# EAGLE board KAI_bit1 (EAGLE 9.4.2)
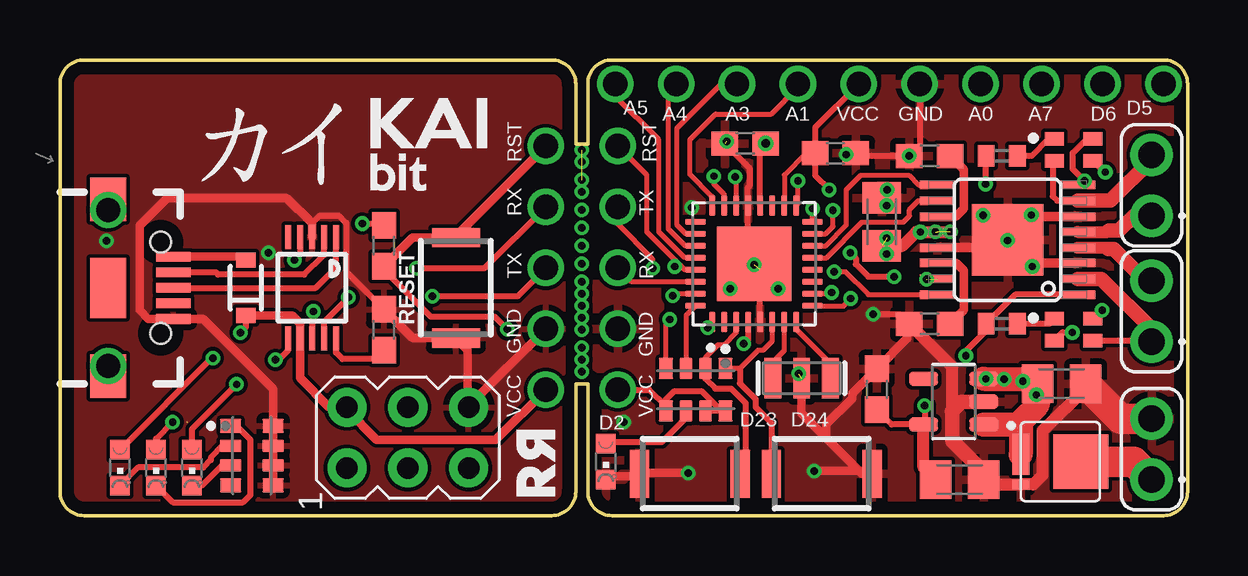
[diagram p0: board, top side]
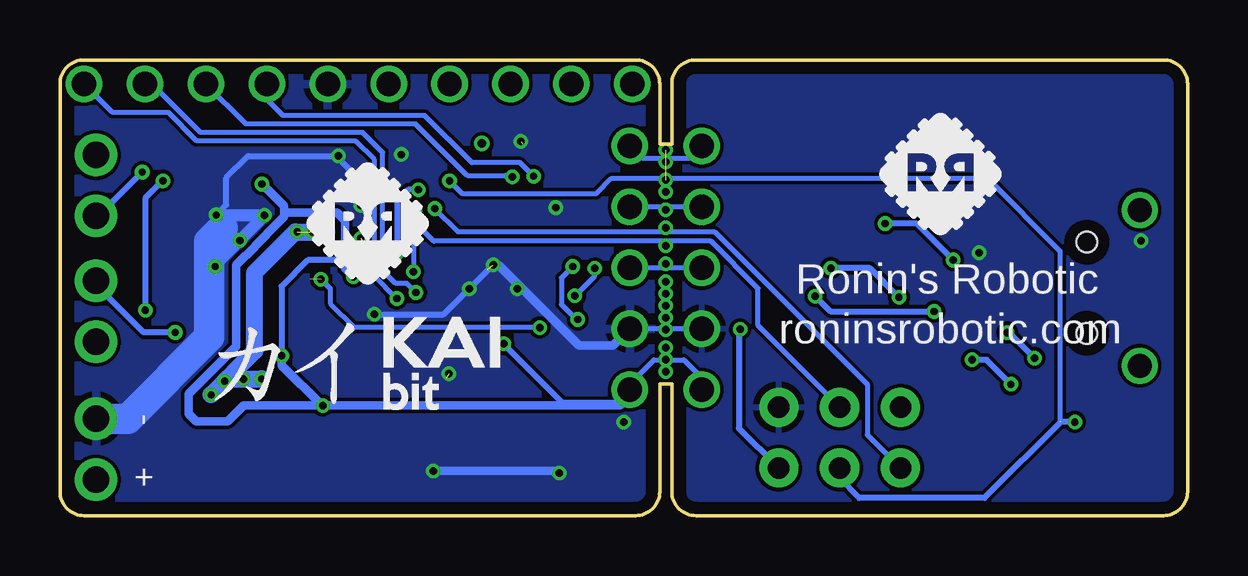
[diagram p1: board, bottom side, seen from below]

Size 47 x 19 mm. Coordinates in mm from the lower left corner, seen from the top.
Outline: 23,19 46,19 arc-90 47,18 47,1 arc-90 46,0 23,0 arc-90 22,1 22,5.5 21.5,5.5 21.5,1 arc-90 20.5,0 1,0 arc-90 0,1 0,18 arc-90 1,19 20.5,19 arc-90 21.5,18 21.5,15.5 22,15.5 22,18 arc-90 23,19
Copper layers (1*16): Top 0.035mm / dielectric 1.6mm / Bottom 0.035mm
Design rules "Elecrow_2-layer_PCB_eagle_rule": minimum track width 6mil, minimum drill 12mil, track to track 6mil, track to pad 6mil, pad to pad 6mil, via to via 8mil, smd to smd 0mil, copper to edge 20mil, drill to drill 10mil, minimum pad ring 6mil, minimum via ring 6mil, stop-mask expansion 0mil, vias tented up to drill 100mil, thermal gap 10mil

## Footprints (pad centres in the part's own frame; a part is rotated, then mirrored left to right if it is on the bottom)
C0805K = smd 1.3 x 1.6: 1 -1,0; 2 1,0
SOD-323 = smd 0.63 x 0.83: 1 -1.15,0; 2 1.15,0
AVRISP = drill 0.9 pad 1.626: 1 -1.27,2.54; 2 1.27,2.54; 3 -1.27,0; 4 1.27,0; 5 -1.27,-2.54; 6 1.27,-2.54
USB-B-MICRO-SMD = smd 1.45 x 0.4: D+ 2.725,0; D- 2.725,0.65; GND 2.725,-1.3; ID 2.725,-0.65; VBUS 2.725,1.3 | smd 1.5 x 1.8: SHIELD1 0,3.685; SHIELD2 0,-3.685 | smd 1.5 x 2.5: SHIELD3 0,0 | hole 0.85: 2.2,1.9; 2.2,-1.9
1X10DFR = drill 1.016 pad 1.524: P$1 0,0; P$2 2.54,0; P$3 5.08,0; P$4 7.62,0; P$5 10.16,0; P$6 12.7,0; P$7 15.24,0; P$8 17.78,0; P$9 20.32,0; P$10 22.86,0
0603-RGB = smd 0.8 x 0.55: 1 -0.805,0.455; 2 -0.805,-0.455; 3 0.805,-0.455; 4 0.805,0.455
DFN-8_3X3 = smd 2.29 x 2.29: D 0,0.8 | smd 0.4 x 0.7: G 0.96,-1.7 | smd 1.7 x 0.7: S -0.3,-1.7
R0402 = smd 0.7 x 0.9: 1 -0.65,0; 2 0.65,0
RESCAXS80P320X160X70-8N = smd 0.61 x 0.9: 1 -1.24,-0.885; 4 1.24,-0.885; 5 1.24,0.885; 8 -1.24,0.885 | smd 0.53 x 0.9: 2 -0.4,-0.885; 3 0.4,-0.885; 6 0.4,0.885; 7 -0.4,0.885
SKRK = smd 0.8 x 2: 1 -2.1,0; 2 2.1,0
MSOP10 = smd 1 x 0.25: 1 -2.113,1; 2 -2.113,0.5; 3 -2.113,0; 4 -2.113,-0.5; 5 -2.113,-1; 6 2.113,-1; 7 2.113,-0.5; 8 2.113,0; 9 2.113,0.5; 10 2.113,1
QFN50P500X500X90-33N = smd 0.86 x 0.26: 1 -2.435,1.75; 2 -2.435,1.25; 3 -2.435,0.75; 4 -2.435,0.25; 5 -2.435,-0.25; 6 -2.435,-0.75; 7 -2.435,-1.25; 8 -2.435,-1.75; 17 2.435,-1.75; 18 2.435,-1.25; 19 2.435,-0.75; 20 2.435,-0.25; 21 2.435,0.25; 22 2.435,0.75; 23 2.435,1.25; 24 2.435,1.75 | smd 0.26 x 0.86: 9 -1.75,-2.435; 10 -1.25,-2.435; 11 -0.75,-2.435; 12 -0.25,-2.435; 13 0.25,-2.435; 14 0.75,-2.435; 15 1.25,-2.435; 16 1.75,-2.435; 25 1.75,2.435; 26 1.25,2.435; 27 0.75,2.435; 28 0.25,2.435; 29 -0.25,2.435; 30 -0.75,2.435; 31 -1.25,2.435; 32 -1.75,2.435 | smd 3.1 x 3.1: 33 0,0
SOT95P280X145-5N = smd 1.21 x 0.59: 1 -1.255,0.95; 2 -1.255,0; 3 -1.255,-0.95; 4 1.255,-0.95; 5 1.255,0.95
SOP65P640X120-17N = smd 1.473 x 0.356: 1 -2.921,2.286; 2 -2.921,1.626; 3 -2.921,0.965; 4 -2.921,0.33; 5 -2.921,-0.33; 6 -2.921,-0.965; 7 -2.921,-1.626; 8 -2.921,-2.286; 9 2.921,-2.286; 10 2.921,-1.626; 11 2.921,-0.965; 12 2.921,-0.33; 13 2.921,0.33; 14 2.921,0.965; 15 2.921,1.626; 16 2.921,2.286 | smd 2.997 x 2.997: 17 0,0
RESONATOR-SMD = smd 0.7 x 1.7: 1 -1.2,0; 2 0,0; 3 1.2,0
1X2 = drill 1.092 pad 1.778: P$1 0,0; P$2 2.54,0
C0603 = smd 1.1 x 1: 1 -0.85,0; 2 0.85,0
0603_LED_GREEN = smd 0.8 x 0.8: A 0,-0.75; C 0,0.75
1X5DFR = drill 1.016 pad 1.524: P$1 0,0; P$2 2.54,0; P$3 5.08,0; P$4 7.62,0; P$5 10.16,0

## Placement (x,y rotation side)
C1  10uf  [C0805K]  34.25,12.25 270 top
C2  CAPACITOR_CER6  [C0805K]  41.75,5.5 0 top
C3  CAPACITOR_CER6  [C0805K]  37.5,1.5 0 top
D2  [SOD-323]  7.75,9.5 90 top
ISP1  AVRISP-6  [AVRISP]  14.5,3.25 90 top
J1  [USB-B-MICRO-SMD]  2,9.5 0 top
JP1  [1X10DFR]  46,18 180 top
L1  RGB  [0603-RGB]  42.25,15.25 180 top
L2  RGB  [0603-RGB]  42.25,7.75 180 top
Q1  AON7401  [DFN-8_3X3]  41.75,2.25 270 top
R1  RESISTOR1  [R0402]  39.25,8 180 top
R2  YC164-JR-071K5  [RESCAXS80P320X160X70-8N]  26.5,5.25 180 top
R3  RESISTOR1  [R0402]  39.25,15 180 top
R7  YC164-JR-071K5  [RESCAXS80P320X160X70-8N]  8,2.5 270 top
S1  SKRKAEE010  [SKRK]  16.5,9.5 90 top
S3  SKRKAEE010  [SKRK]  31.75,1.75 180 top
S4  SKRKAEE010  [SKRK]  26.25,1.75 0 top
U1  CH340ESMD  [MSOP10]  10.5,9.5 270 top
U2  ATMEGA328PB-MU  [QFN50P500X500X90-33N]  28.93,10.5 90 top
U3  TLV73333  [SOT95P280X145-5N]  37.25,4.75 180 top
U$1  DRV8833  [SOP65P640X120-17N]  39.5,11.5 180 top
U$2  RESONATORSMD  [RESONATOR-SMD]  30.91,5.73 180 top
U$3  1X2  [1X2]  45.5,1.5 90 top
U$4  2.2uf  [C0603]  36.25,8 0 top
U$5  CAPACITOR_CER4  [C0603]  34.05,5.27 270 top
U$6  100nf  [C0603]  36.25,15 0 top
U$7  CAPACITOR_CER4  [C0603]  28.56,15.51 0 top
U$8  CAPACITOR_CER4  [C0603]  32.32,15.11 180 top
U$9  CAPACITOR_CER4  [C0603]  13.5,11.25 90 top
U$10  CAPACITOR_CER4  [C0603]  13.5,7.75 90 top
U$11  1X2  [1X2]  45.5,7.25 90 top
U$12  LED0603_R  [0603_LED_GREEN]  5.5,2 180 top
U$13  1X2  [1X2]  45.5,12.5 90 top
U$14  LED0603_R  [0603_LED_GREEN]  2.5,2 180 top
U$15  LED0603_R  [0603_LED_GREEN]  22.75,2.25 180 top
U$16  1X5DFR  [1X5DFR]  20.25,5.25 90 top
U$17  1X5DFR  [1X5DFR]  23.25,5.25 90 top
U$21  LED0603_R  [0603_LED_GREEN]  4,2 180 top

## Library data of the parts
C1-C3 L1 L2 R1 R3 U$4-U$10 U$12 U$14 U$15 U$21 = pasif_com1
D2 U$2 = SparkFun
ISP1 = adafruit
J1 = SparkFun-Connectors; PROD_ID: CONN-11752
JP1 U$3 U$11 U$13 U$16 U$17 = header_3d
Q1 = AON7401
R2 R7 = YC164-JR-071K5; AVAILABILITY: Unavailable; DESCRIPTION: Resistor network: Y; 1.5kΩ; SMD; 1206; No.of resistors: 4; 63mW; ±5%; MF: Yageo; MP: YC164-JR-071K5; PACKAGE: 1206 Yageo; PRICE: None
S1 S3 S4 = SKRKAEE010; AVAILABILITY: Unavailable; DESCRIPTION: Switch Tactile N.O. SPST Round Button Gull Wing 0.05A 12VDC 1.57N SMD T/R; MF: ALPS; MP: SKRKAEE010; PACKAGE: None; PRICE: None
U1 = CH340E
U2 = atmega; MANUFACTURER: MICROCHIP; PACKAGE: QFN-32; PARTREV: C; STANDARD: IPC 7351B
U3 = TLV73318PDBVR; DESCRIPTION: Capacitor-Free, 300-mA, Low-Dropout Regulator with Foldback Current Limit for Portable Devices 5-SOT-23 -40 to 125; DIGI-KEY_PART_NUMBER: 296-40669-1-ND; DIGI-KEY_PURCHASE_URL: https://www.digikey.com/product-detail/en/texas-instruments/TLV73318PDBVR/296-40669-1-ND/5178546?utm_source=snapeda&utm_medium=aggregator&utm_campaign=symbol; MF: Texas Instruments; MP: TLV73318PDBVR; PACKAGE: SOT-23 Texas Instruments
U$1 = icv1

## Nets
A0: JP1.P$4 U2.23
A1: JP1.P$7 U2.24
A2: U2.25
A3: JP1.P$8 U2.26
A4: JP1.P$9 U2.27
A5: JP1.P$10 U2.28
A6: U2.19
A7: JP1.P$3 U2.22
ARF: U2.20 U$7.2
D2: R2.3 U2.32
D3: U2.1 U$1.15
D4: U2.2
D5: JP1.P$1 U2.9
D6: JP1.P$2 U2.10
D7: U2.11
D8: U2.12
D9: U2.13 U$1.10
D10: U2.14 U$1.9
D11: ISP1.4 U2.15 U$1.16
D12: ISP1.1 U2.16
D13: ISP1.3 U2.17 U$21.A
D23: R2.2 S4.2 U2.3
D24: R2.1 S3.2 U2.6
GND: C1.1 C2.2 C3.2 ISP1.6 J1.GND JP1.P$5 Q1.G R7.5 R7.6 R7.7 R7.8 S1.1 S3.1 S4.1 U1.3 U2.5 U2.21 U3.2 U$1.3 U$1.6 U$1.13 U$1.17 U$2.2 U$3.P$2 U$4.1 U$5.1 U$6.1 U$7.1 U$8.1 U$10.2 U$15.C U$16.P$2 U$17.P$2
N$1: R7.1 U$21.C
N$2: L1.2 L2.2 U$1.8
N$3: J1.D- U1.2
N$4: R7.3 U$12.C
N$5: U1.10 U$10.1
N$6: J1.D+ U1.1
N$7: D2.2 J1.VBUS
N$8: U1.4 U$9.2
N$9: R7.2 U$14.C
N$10: U1.6 U$12.A
N$11: L1.3 R3.1
N$12: Q1.D U$3.P$1
N$13: L2.1 U$1.2 U$11.P$1
N$14: L2.3 R1.1
N$15: L2.4 U$1.4 U$11.P$2
N$16: L1.1 U$1.5 U$13.P$1
N$18: L1.4 U$1.7 U$13.P$2
N$19: R2.6 U$15.A
N$22: U$1.11 U$6.2
N$25: U$1.14 U$4.2
OC1: U2.7 U$2.3
OC2: U2.8 U$2.1
RST: ISP1.5 R2.4 S1.2 U2.29 U$9.1 U$16.P$5 U$17.P$5
RX: U1.8 U2.30 U$16.P$3 U$17.P$3
TX: U1.9 U2.31 U$16.P$4 U$17.P$4
VCC: C3.1 D2.1 ISP1.2 JP1.P$6 R1.2 R2.5 R2.7 R2.8 R3.2 U1.7 U2.4 U2.18 U3.5 U$1.1 U$5.2 U$8.2 U$14.A U$16.P$1 U$17.P$1
VIN: C1.2 C2.1 Q1.S U3.1 U3.3 U$1.12

## Tracks (layer width: path | path; a pad name or v marks a point on that pad's centre or on a via)
A0  (via drill 0.3)
  Top 0.2: U2.23 27.68,13.4 27.26,13.83 v27.26,14.15
  Bottom 0.2: v27.26,14.15 27.82,14.71 29.83,14.71 31.8,16.68 37.7,16.68 38.38,17.36 JP1.P$4
A1
  Top 0.2: U2.24 27.18,13.31 26.25,14.24 26.25,15.67 27.33,16.75 29.65,16.75 30.76,17.86 JP1.P$7
A3
  Top 0.2: U2.26 26.09,11.75 25.73,12.11 25.73,16.16 27.58,18.01 28.21,18.01 JP1.P$8
A4
  Top 0.2: U2.27 26.07,11.25 25.36,11.95 25.36,17.68 JP1.P$9
A5
  Top 0.2: U2.28 26.48,10.77 26.03,10.77 24.97,11.82 24.97,15.67 23.14,17.5 JP1.P$10
A7  (via drill 0.3)
  Top 0.2: U2.22 28.19,14.13 v28.15,14.13
  Bottom 0.2: v28.15,14.13 28.39,14.13 28.44,14.18 30.03,14.18 32.17,16.33 39.25,16.33 JP1.P$3
ARF  (via drill 0.35)
  Top 0.2: 29.27,15.37 U$7.2
  Top 0.254: 29.27,15.37 29.18,15.28 U2.20
  other vias: 29.41,15.51
D2
  Top 0.2: U2.32 26.1,8.35 R2.3
D3  (via drill 0.3)  (1 unrouted)
  Top 0.2: U2.1 27,7.89 v27,7.84
  Bottom 0.2: v27,7.84 34.73,7.84 35.74,8.85 35.74,9.47 v36.12,9.85
D5  (via drill 0.3)
  Top 0.2: U2.9 31.39,8.73 32.64,8.73 v32.96,9.05
  Bottom 0.2: v32.96,9.05 33.89,9.98 33.89,14.84 34.68,15.62 41.3,15.62 42.49,16.82 44.82,16.82 JP1.P$1
D6  (via drill 0.3)
  Top 0.2: v32.17,9.3 32.11,9.25 U2.10
  Bottom 0.2: v32.17,9.3 32.54,9.68 33,9.68 33.54,10.22 33.54,15.14 34.38,15.97 41.13,15.97 43.16,18 JP1.P$2
D9
  Top 0.2: U2.13 31.94,10.75 33.43,12.23 35.15,12.23 35.41,12.49 35.41,12.75 35.78,13.13 U$1.10
D10
  Top 0.2: U2.14 31.92,11.25 32.78,12.11 32.78,13.59 33.38,14.19 35.38,14.19 35.79,13.79 U$1.9
D11  (via drill 0.3)
  Top 0.2: U2.15 31.91,11.75 32.22,12.06 v32.22,12.73 | v32.27,10.17 32.73,10.17 33.69,9.21 U$1.16
  Bottom 0.2: v32.27,10.17 32.26,10.18 32.26,12.69 v32.22,12.73 32.22,12.24 31.42,11.44 19.87,11.44 17.91,9.47 17.91,7.92 ISP1.4
D12  (via drill 0.3)
  Top 0.2: U2.16 31.37,12.79 v31.38,12.8
  Bottom 0.2: v31.38,12.8 30.42,11.84 19.72,11.84 13.35,5.47 13.35,3.37 ISP1.1
D13  (via drill 0.3)  (1 unrouted)
  Top 0.2: U2.17 30.76,13.02 v30.76,13.95
  Top 0.254: U$21.A 4,3.2 v4.7,3.9
  Bottom 0.2: v30.76,13.95 30.25,13.44 24.64,13.44 24.01,14.06 8.34,14.06 5.31,11.04 5.31,3.9
  Bottom 0.254: v4.7,3.9 5.29,3.9 8.46,0.73 13.69,0.73 14.5,1.54 ISP1.3
D23
  Top 0.2: U2.3 28.18,7.63 27.68,7.12 27.44,7.12 26.9,6.59 R2.2
  Top 0.254: R2.2 26.9,5.71 27.31,5.29 27.97,5.29 28.57,4.69 28.57,1.97 S4.2
D24
  Top 0.2: R2.1 28.34,6.13 29.09,6.89 29.3,6.89 29.67,7.26 U2.6
  Top 0.254: 28.34,6.13 28.34,5.52 28.99,4.86 28.99,4.53 29.65,3.87 S3.2
GND  (via drill 0.3)  (3 unrouted)
  Top 0.2: 24.03,1.63 S4.1
  Top 0.254: U2.5 29.18,10.27 28.68,10.77 U2.21 28.68,13.7 28.75,13.77 28.75,14.48 U$7.1 | U$4.1 35.33,8.07 35.01,8.39 v33.89,8.39 | S3.1 33.7,1.75 | 33.7,1.75 33.42,1.75 31.96,3.22 30.91,4.26 | U$5.1 34.05,5.91 | v31.43,1.86 33.6,1.86 33.7,1.75 | v34.48,13.58 34.48,13.48 C1.1 | U$8.1 33.28,15 U$6.1 35.84,15.44 JP1.P$5 | 10.51,12.2 10.82,12.51 11.63,12.51 11.93,12.2 11.93,10.17 U$10.2
  Top 0.35: U$15.C 22.88,1.63 24.03,1.63 | S4.1 24.17,1.77 v26.19,1.77 | v31.43,1.86 33.74,1.86 S3.1 | 33.42,1.75 30.91,4.26 U$2.2 | 31.96,3.22 31.96,3.82 33.03,4.89 33.03,5.1 U$5.1 35.33,7.4 35.33,8.07 | U$16.P$2 17.04,4.58 | 17.04,4.58 16.99,4.53 16.99,6.91 S1.1 14.7,7.4 U$10.2 | 17.04,4.58 ISP1.6 | R7.5 R7.6 R7.8 8.88,5.28 5.96,8.2 J1.GND 3.68,8.2 3.32,8.56 3.32,12.09 4.48,13.24 9.46,13.24 10.51,12.2 U1.3
  Top 0.4: U$1.6 40.34,12.46 40.16,12.65 39.5,11.99 U$1.17 | U$1.3 39.81,10.54 39.17,11.17 U$1.13
  Top 0.5: 38.11,4.75 U3.2 | U$4.1 37.17,6.23 37.17,4.35 | C3.2 38.71,1.29 Q1.G 40.57,1.3 40.95,1.68 40.95,3.51 42.75,5.31 C2.2
  Top 0.508: 39.17,11.17 U$1.17
  Top 0.6: C3.2 38.5,1.8 37.19,3.11 37.19,4.37 | 37.17,4.35 37.19,4.37 | 37.19,4.37 37.58,4.75 38.11,4.75
  Top 1.27: U$3.P$2 44.21,4.04 C2.2
  Bottom 0.2: U$16.P$2 U$17.P$2
  Bottom 0.254: v33.89,8.39 31.01,8.39 v28.94,10.46 | v34.48,13.58 34.48,13.99 35.4,14.91 U$6.1 39.15,15 40.07,14.09 40.07,12.96 v40.49,12.53
  Bottom 0.35: U$17.P$2 23.95,7.09 25.36,7.09 28.73,10.46 v28.94,10.46 | v26.19,1.77 26.27,1.86 v31.43,1.86
  Bottom 0.5: v40.53,10.39 40.53,10.45 v39.5,11.47 38.48,12.49 v38.48,12.53 38.49,12.53 v40.49,12.53 40.22,12.26 40.22,11.98
  Bottom 1.27: U$3.P$2 44.19,4.04 40.77,7.45 40.77,11.43 40.22,11.98
  other vias: 35.4,15 27.94,9.46 29.94,9.46 8.69,10.96 1.94,11.46 27.79,15.6 32.77,15.06 26.33,12.85 30.79,5.91 23.5,3.89 34.45,12.93
  pour Top: 22.25,0.75 arc90 23,0 46,0 arc90 47,1 47,18 arc90 46,19 23,19 arc90 22.25,18.25
  pour Bottom: 47,1 arc-90 46,0 23,0 arc-90 22.25,0.75 22.25,18.25 arc-90 23,19 46,19 arc-90 47,18
  pour Top: 0,1 0,18 arc-90 1,19 20,19 arc-90 21,18 21,1.25 arc-90 19.75,0 1,0 arc-90
  pour Bottom: 0,18 0,1 arc90 1,0 20,0 arc90 21,1 21,18 arc90 20,19 1,19 arc90
N$1
  Top 0.254: U$21.C 4.69,0.56 7.64,0.56 7.94,0.86 7.94,3.17 7.37,3.74 R7.1
N$2  (via drill 0.3)
  Top 0.254: U$1.8 42.6,13.96 v42.71,13.96 v42.7,13.96 42.21,14.45 42.21,15.12 42.8,15.71 L1.2 | L2.2 43.09,8.21 v43.44,8.56
  Bottom 0.254: v43.44,8.56 43.44,13.23 v42.71,13.96
N$3
  Top 0.254: J1.D- 6.49,10.15 6.59,10.05 10.19,10.05 11,10.86 U1.2
N$4
  Top 0.254: U$12.C 5.91,1.25 6.76,2.1 R7.3
N$5
  Top 0.254: U$10.1 13.12,6.52 11.78,6.52 11.5,6.8 U1.10
N$6
  Top 0.254: J1.D+ 10.66,9.5 11.5,10.34 U1.1
N$7
  Top 0.35: J1.VBUS 7.6,10.8 D2.2
N$8  (via drill 0.3)
  Top 0.254: U1.4 10,10.89 v9.77,10.66 | v12.6,12.18 13.42,12.18 U$9.2
  Bottom 0.254: v9.77,10.66 11.29,12.18 v12.6,12.18
N$9
  Top 0.254: R7.2 6.81,2.9 6.79,2.92 6.29,2.42 6.29,2.31 5.98,2.01 3.26,2.01 U$14.C
N$10  (via drill 0.3)
  Top 0.254: U$12.A 5.5,3.61 v7.36,5.47 | v8.98,6.5 9.11,6.5 9.5,6.88 U1.6
  Bottom 0.254: v7.36,5.47 8.38,6.5 v8.98,6.5
N$11
  Top 0.254: L1.3 41.21,15.71 40.5,15 R3.1
N$12
  Top 1.27: U$3.P$1 44.75,2.25 Q1.D
N$13
  Top 0.254: L2.1 45.46,7.29 45.53,7.22
  Top 0.6: U$11.P$1 45.53,7.22 45.53,7.75 43.41,9.87 U$1.2
N$14
  Top 0.254: L2.3 41.24,8 R1.1
N$15  (via drill 0.3)
  Top 0.254: L2.4 41.79,7.64 v42.2,7.64
  Top 0.5: U$1.4 43.66,11.17 43.71,11.12
  Top 0.6: 43.71,11.12 43.92,11.12 45.25,9.79 U$11.P$2
  Bottom 0.254: v42.2,7.64 43.52,7.64 45.5,9.62 U$11.P$2
N$16  (via drill 0.3)
  Top 0.254: L1.1 43.53,14.32 v43.57,14.32
  Top 0.5: 45.3,12.5 U$13.P$1 | U$1.5 43.68,11.83 43.72,11.88
  Top 0.6: 45.12,12.5 45.3,12.5 | 43.72,11.88 44.14,11.88 44.76,12.5 U$13.P$1
  Bottom 0.254: v43.57,14.32 45.4,12.5 U$13.P$1
N$17  (via drill 0.3 pad 0)
  other vias: 21.75,6
N$18
  Top 0.254: U$1.7 41.57,13.13 41.38,13.31 41.38,14.79 L1.4
  Top 0.6: U$1.7 43.79,13.13 45.5,14.84 U$13.P$2
N$19
  Top 0.254: U$15.A 22.82,3.07 25.09,3.07 26.1,4.08 R2.6
N$20  (via drill 0.3 pad 0)
  other vias: 21.75,7
N$21  (via drill 0.3 pad 0)
  other vias: 21.75,7.75
N$22
  Top 0.35: U$1.11 37.33,12.46 37.67,12.8 37.67,14.43 U$6.2
N$23  (via drill 0.3 pad 0)
  other vias: 21.75,8.25
N$24  (via drill 0.3 pad 0)
  other vias: 21.75,8.75
N$25
  Top 0.35: U$1.14 37.36,10.54 37.67,10.22 37.67,8.57 U$4.2
N$26  (via drill 0.3 pad 0)
  other vias: 21.75,9.25
N$27  (via drill 0.3 pad 0)
  other vias: 21.75,9.75
N$28  (via drill 0.3 pad 0)
  other vias: 21.75,10.5
N$29  (via drill 0.3 pad 0)
  other vias: 21.75,11.25
N$30  (via drill 0.3 pad 0)
  other vias: 21.75,12
N$31  (via drill 0.3 pad 0)
  other vias: 21.75,12.75
N$32  (via drill 0.3 pad 0)
  other vias: 21.75,13.5
N$33  (via drill 0.3 pad 0, 0.3 pad 0.1)  (2 unrouted)
  other vias: 21.75,14 21.75,14.75 21.75,15.25
N$34  (via drill 1 pad 0)
  other vias: 2,6.25
N$35  (via drill 1 pad 0)
  other vias: 2,12.75
OC1
  Top 0.2: U2.7 30.18,6.87 29.71,6.4 U$2.3
OC2
  Top 0.2: U2.8 30.68,7.78 32.11,6.35 U$2.1
RST  (via drill 0.3)
  Top 0.2: U2.29 26.04,10.25 25.78,10.52 | U$17.P$5 24.46,14.2 24.46,11.83 25.78,10.52 | R2.4 25.26,8.02 v25.42,8.18 | v25.62,10.38 25.75,10.52 25.78,10.52
  Top 0.254: U$9.1 13.5,10.25 15.46,8.29 18.13,8.29 v18.65,7.77
  Top 0.35: U$16.P$5 16.5,11.66 S1.2 14.7,11.6 U$9.1
  Bottom 0.2: v25.42,8.18 25.46,8.18 26.1,8.81 26.1,9.91 v25.62,10.38 | U$16.P$5 20.75,14.91 22.75,14.91 U$17.P$5
  Bottom 0.254: v18.65,7.77 18.7,7.71 18.7,3.64 ISP1.5
RX  (via drill 0.3)
  Top 0.2: U2.30 23.83,9.75 U$17.P$3
  Top 0.254: U$16.P$3 19.06,9.14 v15.52,9.14 | v10.56,8.51 10.5,8.45 U1.8
  Bottom 0.2: U$16.P$3 U$17.P$3
  Bottom 0.254: v15.52,9.14 14.88,8.51 v10.56,8.51
TX  (via drill 0.3)
  Top 0.2: U2.31 25.63,9.25 v25.54,9.16 | v24.7,10.31 24.7,10.7 23.25,12.15 U$17.P$4
  Top 0.254: U1.9 11,8.07 v12.03,9.1 | U$16.P$4 17.7,10.32 v14.86,10.32
  Bottom 0.2: v25.54,9.16 24.7,10 v24.7,10.31 | U$16.P$4 U$17.P$4
  Bottom 0.254: v12.03,9.1 13.25,10.32 v14.86,10.32
VCC  (via drill 0.3, 0.3 pad 0)
  Top 0.2: U2.18 30.19,12.95 30.19,14.2 31.1,15.11 U$8.2
  Top 0.254: U$1.1 39.81,9.21 R1.2 38.6,7.71 37.76,6.87 v37.76,6.66 | v36.05,4.59 36.05,3.85 U3.5 34.66,3.8 U$5.2 | R3.2 38.58,14.98 v38.58,13.82 | R2.8 27.38,4.37 | 27.38,4.37 R2.7 | R2.5 25.26,4.55 | 25.26,4.55 25.26,4.84 25.62,5.2 26.74,5.2 27.38,4.56 27.38,4.37 | JP1.P$6 31.47,16.17 U$8.2 31.47,14.19 v32.07,13.59 | U2.4 28.68,7.34 v28.5,7.16 | U$17.P$1 24.56,5.25 25.26,4.55 | v32.94,10.96 33.17,10.74 33.17,10.48 33.69,9.96 v34.77,9.96 | U$14.A 6.31,6.57 v6.38,6.57 | v7.52,7.63 7.75,7.86 D2.1
  Top 0.35: D2.1 9.67,8.35 10,8.02 U1.7 10,5.75 11.23,4.52 ISP1.2 11.96,4.4 13.2,3.15 18.16,3.15 U$16.P$1
  Top 0.5: C3.1 36,2 U3.5
  Bottom 0.2: U$16.P$1 20.25,5.75 21,6.5 v21.75,6.5 22.25,6.5 23.25,5.5 U$17.P$1
  Bottom 0.254: 37.65,12.64 37.65,12.46 | 37.9,12.21 39.66,10.45 | v28.5,7.16 26.04,4.7 23.66,4.7 | v32.07,13.59 32.49,13.59 32.95,13.13 v32.95,10.97 v32.94,10.96 | v37.76,6.66 37.76,9.56 36.67,10.65 35.11,10.65 | v6.38,6.57 7.44,7.63 v7.52,7.63
  Bottom 0.35: v36.05,4.59 39.34,4.59 40,3.92 41.32,3.92 41.63,4.23 41.63,5.08 39.66,7.05 39.66,10.45 39.27,10.84 39.24,10.84 38.87,11.21 38.87,11.24 37.9,12.21 | 37.9,12.21 37.65,12.46 | 37.9,12.21 37.9,12.22 37.65,12.47 37.65,12.64 | 37.65,12.64 37.65,12.9 v38.58,13.82 | 37.65,12.64 35.44,12.64 35.11,12.31 35.11,10.65 35.11,10.3 v34.77,9.96 | v36.05,4.59 23.66,4.59 23.55,4.7 23.66,4.7 23.66,4.84 U$17.P$1 | v37.76,6.66 37.75,6.65 37.75,6.25 36.08,4.59 v36.05,4.59
VIN  (via drill 0.3)  (3 unrouted)
  Top 0.254: C1.2 34.46,11.04 v34.46,10.91
  Top 0.508: v37.12,11.83 v35.87,11.83 v35.87,11.82 35.69,11.82 35.11,11.25 C1.2
  Top 0.7: C2.1 40.71,5.54 40.25,5.54 40.23,5.56 40.18,5.56 v40.14,5.6
  Top 1: C2.1 40.75,4.62 40.05,3.92 | 40.05,3.92 Q1.S | U3.1 39.93,3.8 40.05,3.92 | U3.3 40.55,5.7 40.71,5.54
  Bottom 0.7: v38.6,5.7 v38.6,5.71 39.33,5.71 v39.35,5.68 | v39.35,5.68 39.39,5.72 40.02,5.72 v40.14,5.6 | v39.35,5.68 40.05,5.68 v40.7,5.04 38.88,6.86 38.88,10.14 37.19,11.82 v35.87,11.82
  other vias: 36.49,11.83 34.46,11.57

## Text on the board
tPlace: A5 | A4 | A3 | A1 | VCC | GND | A0 | A7 | D6 | D5 | RST | RST | RX | TX | RESET | TX | RX | GND | GND | VCC | VCC | D2 | D23 | D24
bPlace: Ronin's Robotic | roninsrobotic.com | - | +